# EAGLE board CONNECTOR (EAGLE 7.7.0)
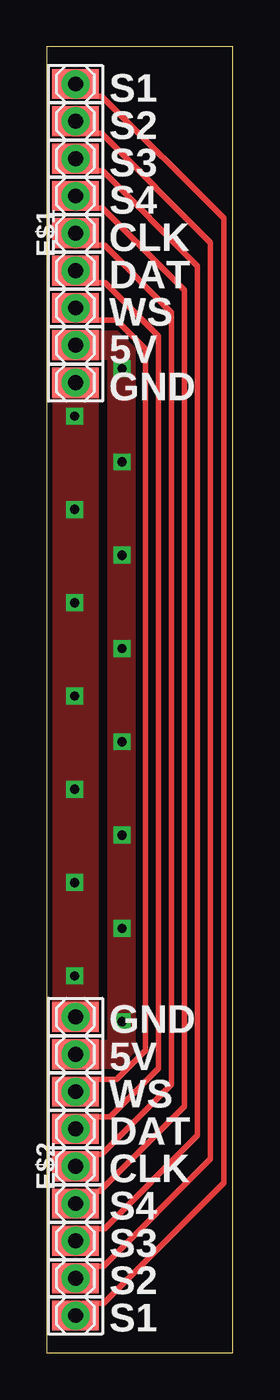
[diagram p0: board, top side]
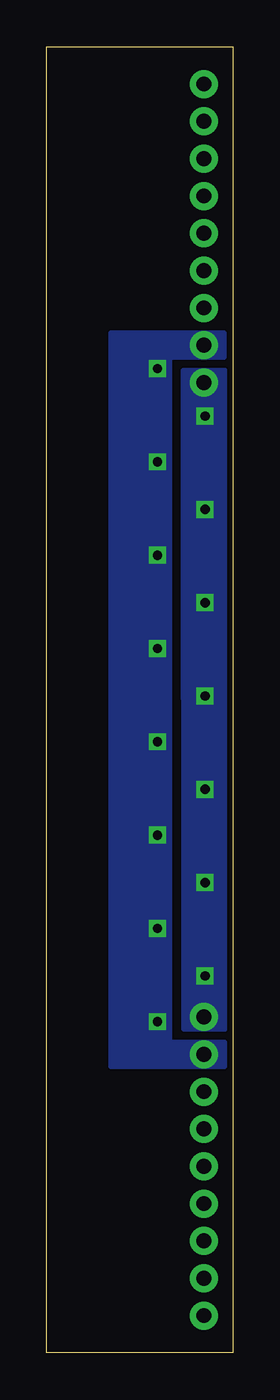
[diagram p1: board, bottom side, seen from below]

Size 10 x 70 mm. Coordinates in mm from the lower left corner, seen from the top.
Outline: 0,70 0,0 10,0 10,70 0,70
Copper layers (1*16): Top 0.035mm / dielectric 1.5mm / Bottom 0.035mm
Design rules "default *": minimum track width 10mil, minimum drill 24mil, track to track 8mil, track to pad 8mil, pad to pad 8mil, via to via 8mil, smd to smd 8mil, copper to edge 0.3mm, drill to drill 8mil, minimum pad ring 10mil, minimum via ring 8mil, stop-mask expansion 4mil, vias tented up to drill 40mil, thermal gap 10mil

## Footprints (pad centres in the part's own frame; a part is rotated, then mirrored left to right if it is on the bottom)
CONNECTOR = smd 1.6 x 2.5: 1 -8,0; 2 -6,0; 3 -4,0; 4 -2,0; 5 0,0; 6 2,0; 7 4,0; 8 6,0; 9 8,0
1X09-PTH_2 = drill 0.8 pad 1.5: 1 -8,0; 2 -6,0; 3 -4,0; 4 -2,0; 5 0,0; 6 2,0; 7 4,0; 8 6,0; 9 8,0

## Placement (x,y rotation side)
CON1  CONNECTOR  [CONNECTOR]  1.55,60 90 top
CON3  CONNECTOR  [CONNECTOR]  1.55,10 90 top
E$1  [1X09-PTH_2]  1.55,60 90 top
E$2  [1X09-PTH_2]  1.55,10 90 top

## Library data of the parts
CON1 CON3 = pixel_masterlib; BOM: EXCLUDE
E$1 E$2 = pinhead

## Nets
N$1: CON1.1 CON3.9 E$1.1 E$2.9
N$8: CON1.2 CON3.8 E$1.2 E$2.8
N$16: CON1.3 CON3.7
N$18: CON1.4 CON3.6
N$21: CON1.5 CON3.5
N$22: CON1.6 CON3.4
N$23: CON1.7 CON3.3
N$24: CON1.8 CON3.2
N$25: CON1.9 CON3.1

## Tracks (layer width: path | path; a pad name or v marks a point on that pad's centre or on a via)
N$1  (via drill 0.5)
  other vias: 1.5,50.2 1.5,45.2 1.5,40.2 1.5,35.2 1.5,30.2 1.5,25.2 1.5,20.2
  pour Top (no thermals): 2.65,17.35 2.65,52.65 0.42,52.65 0.45,17.35
  pour Bottom (no thermals): 0.42,17.35 0.42,52.65 2.65,52.65 2.62,17.35
N$8  (via drill 0.5)
  other vias: 4.05,52.75 4.05,47.75 4.05,42.75 4.05,37.75 4.05,32.75 4.05,27.75 4.05,22.75 4.05,17.75
  pour Bottom (no thermals): 6.53,15.35 0.45,15.35 0.45,16.65 3.4,16.65 3.4,53.35 0.5,53.35 0.5,54.65 6.53,54.65
  pour Top (no thermals): 4.62,15.35 0.45,15.35 0.45,16.65 3.4,16.65 3.4,53.35 0.5,53.35 0.5,54.65 4.62,54.65
N$16
  Top 0.3: CON1.3 2.2,55.35 3.75,55.35 5.3,53.8 5.3,16.2 3.75,14.65 1.55,14.65 CON3.7
N$18
  Top 0.3: CON3.6 2.2,12.65 3.4,12.65 6,15.25 6,54.5 3.15,57.35 2.2,57.35 CON1.4 1.55,57.35
N$21
  Top 0.3: CON1.5 2.2,59.35 3.1,59.35 6.7,55.75 6.7,14.4 2.95,10.65 2.4,10.65 1.75,10 CON3.5
N$22
  Top 0.3: CON1.6 2.2,61.35 3,61.35 7.4,56.95 7.4,13.2 2.85,8.65 1.65,8.65 1.55,8.55 CON3.4
N$23
  Top 0.3: CON1.7 2.2,63.35 3,63.35 8.1,58.25 8.1,11.65 3.1,6.65 2.2,6.65 CON3.3
N$24
  Top 0.3: CON1.8 2.2,65.35 2.95,65.35 8.8,59.5 8.8,10.4 3.05,4.65 2.25,4.65 1.6,4 CON3.2
N$25
  Top 0.3: CON1.9 2.2,67.35 2.95,67.35 9.5,60.8 9.5,9.1 3.05,2.65 1.55,2.65 CON3.1

## Text on the board
tPlace: S1 | S2 | S3 | S4 | CLK | DAT | WS | 5V | GND | GND | 5V | WS | DAT | CLK | S4 | S3 | S2 | S1